# EAGLE board Qwiic_1Wire_to_I2C_Bridge_DS28E17_Panel (EAGLE 7.6.0), part 1 of 2
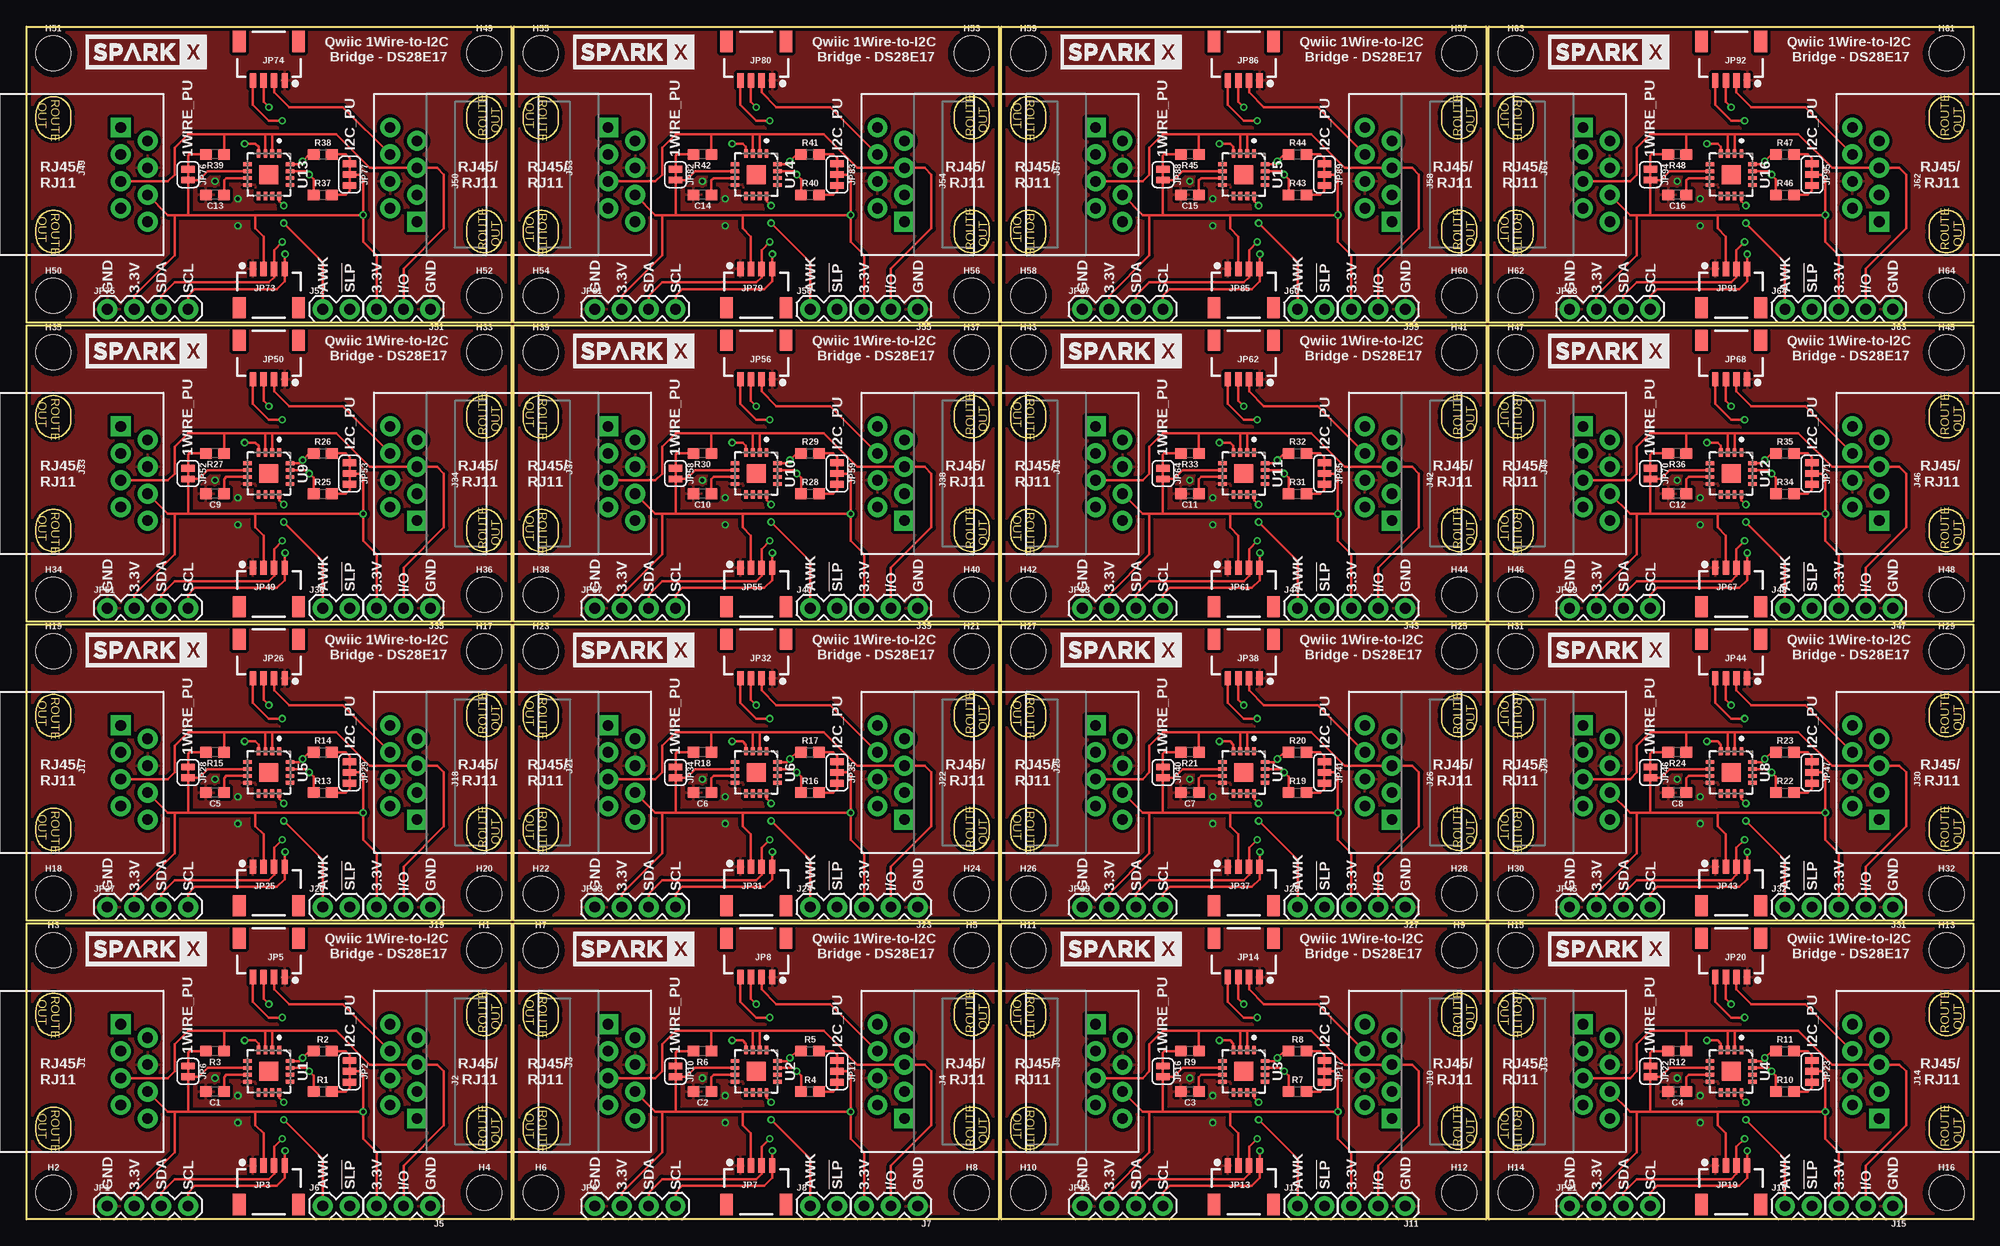
[diagram p0: board, top side]
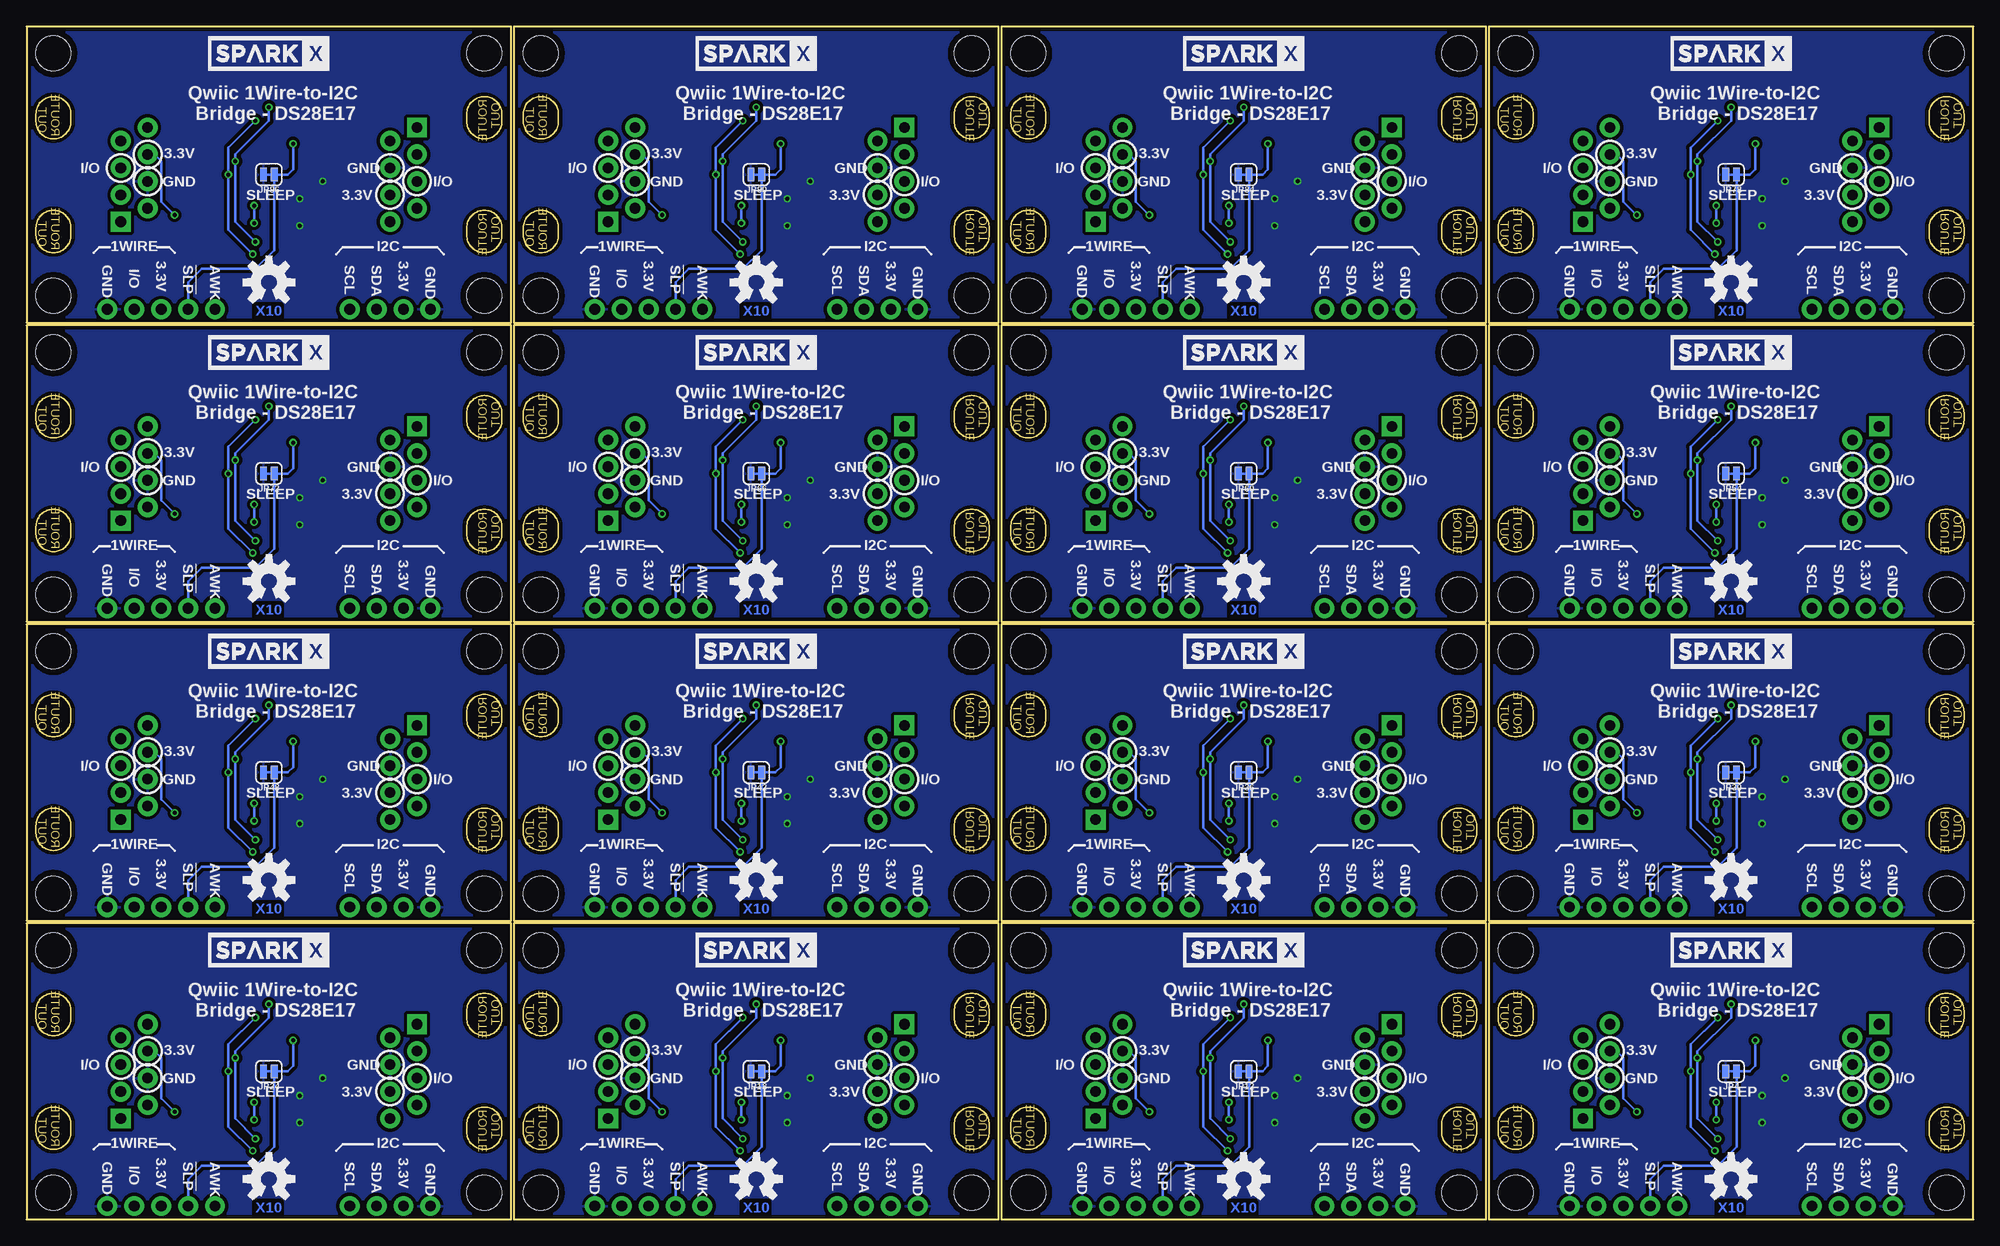
[diagram p1: board, bottom side, seen from below]

Size 183.64 x 112.52 mm. Coordinates in mm from the lower left corner, seen from the top.
Outline: 0,0 0,27.94 45.72,27.94 45.72,0 0,0
Outline: 45.97,0 45.97,27.94 91.69,27.94 91.69,0 45.97,0
Outline: 91.95,0 91.95,27.94 137.67,27.94 137.67,0 91.95,0
Outline: 137.92,0 137.92,27.94 183.64,27.94 183.64,0 137.92,0
Outline: 0,28.19 0,56.13 45.72,56.13 45.72,28.19 0,28.19
Outline: 45.97,28.19 45.97,56.13 91.69,56.13 91.69,28.19 45.97,28.19
Outline: 91.95,28.19 91.95,56.13 137.67,56.13 137.67,28.19 91.95,28.19
Outline: 137.92,28.19 137.92,56.13 183.64,56.13 183.64,28.19 137.92,28.19
Outline: 0,56.39 0,84.33 45.72,84.33 45.72,56.39 0,56.39
Outline: 45.97,56.39 45.97,84.33 91.69,84.33 91.69,56.39 45.97,56.39
Outline: 91.95,56.39 91.95,84.33 137.67,84.33 137.67,56.39 91.95,56.39
Outline: 137.92,56.39 137.92,84.33 183.64,84.33 183.64,56.39 137.92,56.39
Outline: 0,84.58 0,112.52 45.72,112.52 45.72,84.58 0,84.58
Outline: 45.97,84.58 45.97,112.52 91.69,112.52 91.69,84.58 45.97,84.58
Outline: 91.95,84.58 91.95,112.52 137.67,112.52 137.67,84.58 91.95,84.58
Outline: 137.92,84.58 137.92,112.52 183.64,112.52 183.64,84.58 137.92,84.58
Copper layers (1*16): Top 0.035mm / dielectric 1.5mm / Bottom 0.035mm
Design rules "ITEADstudio_DRC": minimum track width 6mil, minimum drill 12mil, track to track 6mil, track to pad 6mil, pad to pad 6mil, via to via 6mil, smd to smd 0mil, copper to edge 10mil, drill to drill 10mil, minimum pad ring 10mil, minimum via ring 6mil, stop-mask expansion 2mil, vias tented up to drill 100mil, thermal gap 10mil
Net classes: 0 default: width 0.203 mm; 1 power: width 0.381 mm, clearance 0.254 mm

## Footprints (pad centres in the part's own frame; a part is rotated, then mirrored left to right if it is on the bottom)
0603 = smd 1.1 x 1: 1 -0.85,0; 2 0.85,0
STAND-OFF = hole 3.302: 0,0
RJ45_RJ11_COMBO = drill 1 pad 1.88 square: 1 -4.445,6.35 | drill 1 pad 1.88: 2 -3.175,8.89; 3 -1.905,6.35; 4 -0.635,8.89; 5 0.635,6.35; 6 1.905,8.89; 7 3.175,6.35; 8 4.445,8.89
1X03 = drill 1.016 pad 1.88: 1 0,0; 2 2.54,0; 3 5.08,0
1X02 = drill 1.016 pad 1.88: 1 0,0; 2 2.54,0
1X04 = drill 1.016 pad 1.88: 1 0,0; 2 2.54,0; 3 5.08,0; 4 7.62,0
SMT-JUMPER_3_2-NC_TRACE_SILK = smd 0.635 x 1.27: 1 -1.016,0; 2 0,0; 3 1.016,0
1X04_1MM_RA = smd 0.6 x 1.35: 1 -1.5,0; 2 -0.5,0; 3 0.5,0; 4 1.5,0 | smd 1.2 x 2: NC1 2.8,-3.675; NC2 -2.8,-3.675
SMT-JUMPER_2_NC_TRACE_SILK = smd 0.635 x 1.27: 1 -0.508,0; 2 0.508,0
TQFN-16 = smd 0.8 x 0.35: 1 -2,0.975; 2 -2,0.325; 3 -2,-0.325; 4 -2,-0.975; 9 2,-0.975; 10 2,-0.325; 11 2,0.325; 12 2,0.975 | smd 0.35 x 0.8: 5 -0.975,-2; 6 -0.325,-2; 7 0.325,-2; 8 0.975,-2; 13 0.975,2; 14 0.325,2; 15 -0.325,2; 16 -0.975,2 | smd 1.778 x 1.778: PAD 0,0

## Placement (x,y rotation side)
C1  1.0uF  [0603]  17.78,12.06 180 top
C2  1.0uF  [0603]  63.75,12.06 180 top
C3  1.0uF  [0603]  109.73,12.06 180 top
C4  1.0uF  [0603]  155.7,12.06 180 top
C5  1.0uF  [0603]  17.78,40.26 180 top
C6  1.0uF  [0603]  63.75,40.26 180 top
C7  1.0uF  [0603]  109.73,40.26 180 top
C8  1.0uF  [0603]  155.7,40.26 180 top
C9  1.0uF  [0603]  17.78,68.45 180 top
C10  1.0uF  [0603]  63.75,68.45 180 top
C11  1.0uF  [0603]  109.73,68.45 180 top
C12  1.0uF  [0603]  155.7,68.45 180 top
C13  1.0uF  [0603]  17.78,96.65 180 top
C14  1.0uF  [0603]  63.75,96.65 180 top
C15  1.0uF  [0603]  109.73,96.65 180 top
C16  1.0uF  [0603]  155.7,96.65 180 top
FRAME1  FRAME-LETTER  [CREATIVE_COMMONS]  -5.08,-16.51 0 top  (outside the outline)
H1  STAND-OFF  [STAND-OFF]  43.18,25.4 0 top
H2  STAND-OFF  [STAND-OFF]  2.54,2.54 0 top
H3  STAND-OFF  [STAND-OFF]  2.54,25.4 0 top
H4  STAND-OFF  [STAND-OFF]  43.18,2.54 0 top
H5  STAND-OFF  [STAND-OFF]  89.15,25.4 0 top
H6  STAND-OFF  [STAND-OFF]  48.51,2.54 0 top
H7  STAND-OFF  [STAND-OFF]  48.51,25.4 0 top
H8  STAND-OFF  [STAND-OFF]  89.15,2.54 0 top
H9  STAND-OFF  [STAND-OFF]  135.13,25.4 0 top
H10  STAND-OFF  [STAND-OFF]  94.49,2.54 0 top
H11  STAND-OFF  [STAND-OFF]  94.49,25.4 0 top
H12  STAND-OFF  [STAND-OFF]  135.13,2.54 0 top
H13  STAND-OFF  [STAND-OFF]  181.1,25.4 0 top
H14  STAND-OFF  [STAND-OFF]  140.46,2.54 0 top
H15  STAND-OFF  [STAND-OFF]  140.46,25.4 0 top
H16  STAND-OFF  [STAND-OFF]  181.1,2.54 0 top
H17  STAND-OFF  [STAND-OFF]  43.18,53.59 0 top
H18  STAND-OFF  [STAND-OFF]  2.54,30.73 0 top
H19  STAND-OFF  [STAND-OFF]  2.54,53.59 0 top
H20  STAND-OFF  [STAND-OFF]  43.18,30.73 0 top
H21  STAND-OFF  [STAND-OFF]  89.15,53.59 0 top
H22  STAND-OFF  [STAND-OFF]  48.51,30.73 0 top
H23  STAND-OFF  [STAND-OFF]  48.51,53.59 0 top
H24  STAND-OFF  [STAND-OFF]  89.15,30.73 0 top
H25  STAND-OFF  [STAND-OFF]  135.13,53.59 0 top
H26  STAND-OFF  [STAND-OFF]  94.49,30.73 0 top
H27  STAND-OFF  [STAND-OFF]  94.49,53.59 0 top
H28  STAND-OFF  [STAND-OFF]  135.13,30.73 0 top
H29  STAND-OFF  [STAND-OFF]  181.1,53.59 0 top
H30  STAND-OFF  [STAND-OFF]  140.46,30.73 0 top
H31  STAND-OFF  [STAND-OFF]  140.46,53.59 0 top
H32  STAND-OFF  [STAND-OFF]  181.1,30.73 0 top
H33  STAND-OFF  [STAND-OFF]  43.18,81.79 0 top
H34  STAND-OFF  [STAND-OFF]  2.54,58.93 0 top
H35  STAND-OFF  [STAND-OFF]  2.54,81.79 0 top
H36  STAND-OFF  [STAND-OFF]  43.18,58.93 0 top
H37  STAND-OFF  [STAND-OFF]  89.15,81.79 0 top
H38  STAND-OFF  [STAND-OFF]  48.51,58.93 0 top
H39  STAND-OFF  [STAND-OFF]  48.51,81.79 0 top
H40  STAND-OFF  [STAND-OFF]  89.15,58.93 0 top
H41  STAND-OFF  [STAND-OFF]  135.13,81.79 0 top
H42  STAND-OFF  [STAND-OFF]  94.49,58.93 0 top
H43  STAND-OFF  [STAND-OFF]  94.49,81.79 0 top
H44  STAND-OFF  [STAND-OFF]  135.13,58.93 0 top
H45  STAND-OFF  [STAND-OFF]  181.1,81.79 0 top
H46  STAND-OFF  [STAND-OFF]  140.46,58.93 0 top
H47  STAND-OFF  [STAND-OFF]  140.46,81.79 0 top
H48  STAND-OFF  [STAND-OFF]  181.1,58.93 0 top
H49  STAND-OFF  [STAND-OFF]  43.18,109.98 0 top
H50  STAND-OFF  [STAND-OFF]  2.54,87.12 0 top
H51  STAND-OFF  [STAND-OFF]  2.54,109.98 0 top
H52  STAND-OFF  [STAND-OFF]  43.18,87.12 0 top
H53  STAND-OFF  [STAND-OFF]  89.15,109.98 0 top
H54  STAND-OFF  [STAND-OFF]  48.51,87.12 0 top
H55  STAND-OFF  [STAND-OFF]  48.51,109.98 0 top
H56  STAND-OFF  [STAND-OFF]  89.15,87.12 0 top
H57  STAND-OFF  [STAND-OFF]  135.13,109.98 0 top
H58  STAND-OFF  [STAND-OFF]  94.49,87.12 0 top
H59  STAND-OFF  [STAND-OFF]  94.49,109.98 0 top
H60  STAND-OFF  [STAND-OFF]  135.13,87.12 0 top
H61  STAND-OFF  [STAND-OFF]  181.1,109.98 0 top
H62  STAND-OFF  [STAND-OFF]  140.46,87.12 0 top
H63  STAND-OFF  [STAND-OFF]  140.46,109.98 0 top
H64  STAND-OFF  [STAND-OFF]  181.1,87.12 0 top
J1  RJ45_RJ11_COMBO  [RJ45_RJ11_COMBO]  2.54,13.97 270 top
J2  RJ45_RJ11_COMBO  [RJ45_RJ11_COMBO]  43.18,13.97 90 top
J3  RJ45_RJ11_COMBO  [RJ45_RJ11_COMBO]  48.51,13.97 270 top
J4  RJ45_RJ11_COMBO  [RJ45_RJ11_COMBO]  89.15,13.97 90 top
J5  [1X03]  38.1,1.27 180 top
J6  [1X02]  27.94,1.27 0 top
J7  [1X03]  84.07,1.27 180 top
J8  [1X02]  73.91,1.27 0 top
J9  RJ45_RJ11_COMBO  [RJ45_RJ11_COMBO]  94.49,13.97 270 top
J10  RJ45_RJ11_COMBO  [RJ45_RJ11_COMBO]  135.13,13.97 90 top
J11  [1X03]  130.05,1.27 180 top
J12  [1X02]  119.89,1.27 0 top
J13  RJ45_RJ11_COMBO  [RJ45_RJ11_COMBO]  140.46,13.97 270 top
J14  RJ45_RJ11_COMBO  [RJ45_RJ11_COMBO]  181.1,13.97 90 top
J15  [1X03]  176.02,1.27 180 top
J16  [1X02]  165.86,1.27 0 top
J17  RJ45_RJ11_COMBO  [RJ45_RJ11_COMBO]  2.54,42.16 270 top
J18  RJ45_RJ11_COMBO  [RJ45_RJ11_COMBO]  43.18,42.16 90 top
J19  [1X03]  38.1,29.46 180 top
J20  [1X02]  27.94,29.46 0 top
J21  RJ45_RJ11_COMBO  [RJ45_RJ11_COMBO]  48.51,42.16 270 top
J22  RJ45_RJ11_COMBO  [RJ45_RJ11_COMBO]  89.15,42.16 90 top
J23  [1X03]  84.07,29.46 180 top
J24  [1X02]  73.91,29.46 0 top
J25  RJ45_RJ11_COMBO  [RJ45_RJ11_COMBO]  94.49,42.16 270 top
J26  RJ45_RJ11_COMBO  [RJ45_RJ11_COMBO]  135.13,42.16 90 top
J27  [1X03]  130.05,29.46 180 top
J28  [1X02]  119.89,29.46 0 top
J29  RJ45_RJ11_COMBO  [RJ45_RJ11_COMBO]  140.46,42.16 270 top
J30  RJ45_RJ11_COMBO  [RJ45_RJ11_COMBO]  181.1,42.16 90 top
J31  [1X03]  176.02,29.46 180 top
J32  [1X02]  165.86,29.46 0 top
J33  RJ45_RJ11_COMBO  [RJ45_RJ11_COMBO]  2.54,70.36 270 top
J34  RJ45_RJ11_COMBO  [RJ45_RJ11_COMBO]  43.18,70.36 90 top
J35  [1X03]  38.1,57.66 180 top
J36  [1X02]  27.94,57.66 0 top
J37  RJ45_RJ11_COMBO  [RJ45_RJ11_COMBO]  48.51,70.36 270 top
J38  RJ45_RJ11_COMBO  [RJ45_RJ11_COMBO]  89.15,70.36 90 top
J39  [1X03]  84.07,57.66 180 top
J40  [1X02]  73.91,57.66 0 top
J41  RJ45_RJ11_COMBO  [RJ45_RJ11_COMBO]  94.49,70.36 270 top
J42  RJ45_RJ11_COMBO  [RJ45_RJ11_COMBO]  135.13,70.36 90 top
J43  [1X03]  130.05,57.66 180 top
J44  [1X02]  119.89,57.66 0 top
J45  RJ45_RJ11_COMBO  [RJ45_RJ11_COMBO]  140.46,70.36 270 top
J46  RJ45_RJ11_COMBO  [RJ45_RJ11_COMBO]  181.1,70.36 90 top
J47  [1X03]  176.02,57.66 180 top
J48  [1X02]  165.86,57.66 0 top
J49  RJ45_RJ11_COMBO  [RJ45_RJ11_COMBO]  2.54,98.55 270 top
J50  RJ45_RJ11_COMBO  [RJ45_RJ11_COMBO]  43.18,98.55 90 top
J51  [1X03]  38.1,85.85 180 top
J52  [1X02]  27.94,85.85 0 top
J53  RJ45_RJ11_COMBO  [RJ45_RJ11_COMBO]  48.51,98.55 270 top
J54  RJ45_RJ11_COMBO  [RJ45_RJ11_COMBO]  89.15,98.55 90 top
J55  [1X03]  84.07,85.85 180 top
J56  [1X02]  73.91,85.85 0 top
J57  RJ45_RJ11_COMBO  [RJ45_RJ11_COMBO]  94.49,98.55 270 top
J58  RJ45_RJ11_COMBO  [RJ45_RJ11_COMBO]  135.13,98.55 90 top
J59  [1X03]  130.05,85.85 180 top
J60  [1X02]  119.89,85.85 0 top
J61  RJ45_RJ11_COMBO  [RJ45_RJ11_COMBO]  140.46,98.55 270 top
J62  RJ45_RJ11_COMBO  [RJ45_RJ11_COMBO]  181.1,98.55 90 top
J63  [1X03]  176.02,85.85 180 top
J64  [1X02]  165.86,85.85 0 top
JP1  [1X04]  7.62,1.27 0 top
JP2  [SMT-JUMPER_3_2-NC_TRACE_SILK]  30.48,13.97 270 top
JP3  [1X04_1MM_RA]  22.86,5.08 0 top
JP4  [SMT-JUMPER_2_NC_TRACE_SILK]  22.86,13.97 180 bottom
JP5  [1X04_1MM_RA]  22.86,22.86 180 top
JP6  [SMT-JUMPER_2_NC_TRACE_SILK]  15.24,13.97 270 top
JP7  [1X04_1MM_RA]  68.83,5.08 0 top
JP8  [1X04_1MM_RA]  68.83,22.86 180 top
JP9  [1X04]  53.59,1.27 0 top
JP10  [SMT-JUMPER_2_NC_TRACE_SILK]  61.21,13.97 270 top
JP11  [SMT-JUMPER_3_2-NC_TRACE_SILK]  76.45,13.97 270 top
JP12  [SMT-JUMPER_2_NC_TRACE_SILK]  68.83,13.97 180 bottom
JP13  [1X04_1MM_RA]  114.81,5.08 0 top
JP14  [1X04_1MM_RA]  114.81,22.86 180 top
JP15  [1X04]  99.57,1.27 0 top
JP16  [SMT-JUMPER_2_NC_TRACE_SILK]  107.19,13.97 270 top
JP17  [SMT-JUMPER_3_2-NC_TRACE_SILK]  122.43,13.97 270 top
JP18  [SMT-JUMPER_2_NC_TRACE_SILK]  114.81,13.97 180 bottom
JP19  [1X04_1MM_RA]  160.78,5.08 0 top
JP20  [1X04_1MM_RA]  160.78,22.86 180 top
JP21  [1X04]  145.54,1.27 0 top
JP22  [SMT-JUMPER_2_NC_TRACE_SILK]  153.16,13.97 270 top
JP23  [SMT-JUMPER_3_2-NC_TRACE_SILK]  168.4,13.97 270 top
JP24  [SMT-JUMPER_2_NC_TRACE_SILK]  160.78,13.97 180 bottom
JP25  [1X04_1MM_RA]  22.86,33.27 0 top
JP26  [1X04_1MM_RA]  22.86,51.05 180 top
JP27  [1X04]  7.62,29.46 0 top
JP28  [SMT-JUMPER_2_NC_TRACE_SILK]  15.24,42.16 270 top
JP29  [SMT-JUMPER_3_2-NC_TRACE_SILK]  30.48,42.16 270 top
JP30  [SMT-JUMPER_2_NC_TRACE_SILK]  22.86,42.16 180 bottom
JP31  [1X04_1MM_RA]  68.83,33.27 0 top
JP32  [1X04_1MM_RA]  68.83,51.05 180 top
JP33  [1X04]  53.59,29.46 0 top
JP34  [SMT-JUMPER_2_NC_TRACE_SILK]  61.21,42.16 270 top
JP35  [SMT-JUMPER_3_2-NC_TRACE_SILK]  76.45,42.16 270 top
JP36  [SMT-JUMPER_2_NC_TRACE_SILK]  68.83,42.16 180 bottom
JP37  [1X04_1MM_RA]  114.81,33.27 0 top
JP38  [1X04_1MM_RA]  114.81,51.05 180 top
JP39  [1X04]  99.57,29.46 0 top
JP40  [SMT-JUMPER_2_NC_TRACE_SILK]  107.19,42.16 270 top
JP41  [SMT-JUMPER_3_2-NC_TRACE_SILK]  122.43,42.16 270 top
JP42  [SMT-JUMPER_2_NC_TRACE_SILK]  114.81,42.16 180 bottom
JP43  [1X04_1MM_RA]  160.78,33.27 0 top
JP44  [1X04_1MM_RA]  160.78,51.05 180 top
JP45  [1X04]  145.54,29.46 0 top
JP46  [SMT-JUMPER_2_NC_TRACE_SILK]  153.16,42.16 270 top
JP47  [SMT-JUMPER_3_2-NC_TRACE_SILK]  168.4,42.16 270 top
JP48  [SMT-JUMPER_2_NC_TRACE_SILK]  160.78,42.16 180 bottom
JP49  [1X04_1MM_RA]  22.86,61.47 0 top
JP50  [1X04_1MM_RA]  22.86,79.25 180 top
JP51  [1X04]  7.62,57.66 0 top
JP52  [SMT-JUMPER_2_NC_TRACE_SILK]  15.24,70.36 270 top
JP53  [SMT-JUMPER_3_2-NC_TRACE_SILK]  30.48,70.36 270 top
JP54  [SMT-JUMPER_2_NC_TRACE_SILK]  22.86,70.36 180 bottom
JP55  [1X04_1MM_RA]  68.83,61.47 0 top
JP56  [1X04_1MM_RA]  68.83,79.25 180 top
JP57  [1X04]  53.59,57.66 0 top
JP58  [SMT-JUMPER_2_NC_TRACE_SILK]  61.21,70.36 270 top
JP59  [SMT-JUMPER_3_2-NC_TRACE_SILK]  76.45,70.36 270 top
JP60  [SMT-JUMPER_2_NC_TRACE_SILK]  68.83,70.36 180 bottom
JP61  [1X04_1MM_RA]  114.81,61.47 0 top
JP62  [1X04_1MM_RA]  114.81,79.25 180 top
JP63  [1X04]  99.57,57.66 0 top
JP64  [SMT-JUMPER_2_NC_TRACE_SILK]  107.19,70.36 270 top
JP65  [SMT-JUMPER_3_2-NC_TRACE_SILK]  122.43,70.36 270 top
JP66  [SMT-JUMPER_2_NC_TRACE_SILK]  114.81,70.36 180 bottom
JP67  [1X04_1MM_RA]  160.78,61.47 0 top
JP68  [1X04_1MM_RA]  160.78,79.25 180 top
JP69  [1X04]  145.54,57.66 0 top
JP70  [SMT-JUMPER_2_NC_TRACE_SILK]  153.16,70.36 270 top
JP71  [SMT-JUMPER_3_2-NC_TRACE_SILK]  168.4,70.36 270 top
JP72  [SMT-JUMPER_2_NC_TRACE_SILK]  160.78,70.36 180 bottom
JP73  [1X04_1MM_RA]  22.86,89.66 0 top
JP74  [1X04_1MM_RA]  22.86,107.44 180 top
JP75  [1X04]  7.62,85.85 0 top
JP76  [SMT-JUMPER_2_NC_TRACE_SILK]  15.24,98.55 270 top
JP77  [SMT-JUMPER_3_2-NC_TRACE_SILK]  30.48,98.55 270 top
JP78  [SMT-JUMPER_2_NC_TRACE_SILK]  22.86,98.55 180 bottom
JP79  [1X04_1MM_RA]  68.83,89.66 0 top
JP80  [1X04_1MM_RA]  68.83,107.44 180 top
JP81  [1X04]  53.59,85.85 0 top
JP82  [SMT-JUMPER_2_NC_TRACE_SILK]  61.21,98.55 270 top
JP83  [SMT-JUMPER_3_2-NC_TRACE_SILK]  76.45,98.55 270 top
JP84  [SMT-JUMPER_2_NC_TRACE_SILK]  68.83,98.55 180 bottom
JP85  [1X04_1MM_RA]  114.81,89.66 0 top
JP86  [1X04_1MM_RA]  114.81,107.44 180 top
JP87  [1X04]  99.57,85.85 0 top
JP88  [SMT-JUMPER_2_NC_TRACE_SILK]  107.19,98.55 270 top
JP89  [SMT-JUMPER_3_2-NC_TRACE_SILK]  122.43,98.55 270 top
JP90  [SMT-JUMPER_2_NC_TRACE_SILK]  114.81,98.55 180 bottom
JP91  [1X04_1MM_RA]  160.78,89.66 0 top
JP92  [1X04_1MM_RA]  160.78,107.44 180 top
JP93  [1X04]  145.54,85.85 0 top
JP94  [SMT-JUMPER_2_NC_TRACE_SILK]  153.16,98.55 270 top
JP95  [SMT-JUMPER_3_2-NC_TRACE_SILK]  168.4,98.55 270 top
JP96  [SMT-JUMPER_2_NC_TRACE_SILK]  160.78,98.55 180 bottom
LOGO1  OSHW-LOGOM  [OSHW-LOGO-M]  22.86,3.81 0 bottom
LOGO2  OSHW-LOGOM  [OSHW-LOGO-M]  68.83,3.81 0 bottom
LOGO3  OSHW-LOGOM  [OSHW-LOGO-M]  114.81,3.81 0 bottom
LOGO4  OSHW-LOGOM  [OSHW-LOGO-M]  160.78,3.81 0 bottom
LOGO5  OSHW-LOGOM  [OSHW-LOGO-M]  22.86,32 0 bottom
LOGO6  OSHW-LOGOM  [OSHW-LOGO-M]  68.83,32 0 bottom
LOGO7  OSHW-LOGOM  [OSHW-LOGO-M]  114.81,32 0 bottom
LOGO8  OSHW-LOGOM  [OSHW-LOGO-M]  160.78,32 0 bottom
LOGO9  OSHW-LOGOM  [OSHW-LOGO-M]  22.86,60.2 0 bottom
LOGO10  OSHW-LOGOM  [OSHW-LOGO-M]  68.83,60.2 0 bottom
LOGO11  OSHW-LOGOM  [OSHW-LOGO-M]  114.81,60.2 0 bottom
LOGO12  OSHW-LOGOM  [OSHW-LOGO-M]  160.78,60.2 0 bottom
LOGO13  OSHW-LOGOM  [OSHW-LOGO-M]  22.86,88.39 0 bottom
LOGO14  OSHW-LOGOM  [OSHW-LOGO-M]  68.83,88.39 0 bottom
LOGO15  OSHW-LOGOM  [OSHW-LOGO-M]  114.81,88.39 0 bottom
LOGO16  OSHW-LOGOM  [OSHW-LOGO-M]  160.78,88.39 0 bottom
R1  4.7k  [0603]  27.94,12.06 0 top
R2  4.7k  [0603]  27.94,15.88 0 top
R3  4.7k  [0603]  17.78,15.88 180 top
R4  4.7k  [0603]  73.91,12.06 0 top
R5  4.7k  [0603]  73.91,15.88 0 top
R6  4.7k  [0603]  63.75,15.88 180 top
R7  4.7k  [0603]  119.89,12.06 0 top
R8  4.7k  [0603]  119.89,15.88 0 top
R9  4.7k  [0603]  109.73,15.88 180 top
R10  4.7k  [0603]  165.86,12.06 0 top
R11  4.7k  [0603]  165.86,15.88 0 top
R12  4.7k  [0603]  155.7,15.88 180 top
R13  4.7k  [0603]  27.94,40.26 0 top
R14  4.7k  [0603]  27.94,44.07 0 top
R15  4.7k  [0603]  17.78,44.07 180 top
R16  4.7k  [0603]  73.91,40.26 0 top
R17  4.7k  [0603]  73.91,44.07 0 top
R18  4.7k  [0603]  63.75,44.07 180 top
R19  4.7k  [0603]  119.89,40.26 0 top
R20  4.7k  [0603]  119.89,44.07 0 top
R21  4.7k  [0603]  109.73,44.07 180 top
R22  4.7k  [0603]  165.86,40.26 0 top
R23  4.7k  [0603]  165.86,44.07 0 top
R24  4.7k  [0603]  155.7,44.07 180 top
R25  4.7k  [0603]  27.94,68.45 0 top
R26  4.7k  [0603]  27.94,72.26 0 top
R27  4.7k  [0603]  17.78,72.26 180 top
R28  4.7k  [0603]  73.91,68.45 0 top
R29  4.7k  [0603]  73.91,72.26 0 top
R30  4.7k  [0603]  63.75,72.26 180 top
R31  4.7k  [0603]  119.89,68.45 0 top
R32  4.7k  [0603]  119.89,72.26 0 top
R33  4.7k  [0603]  109.73,72.26 180 top
R34  4.7k  [0603]  165.86,68.45 0 top
R35  4.7k  [0603]  165.86,72.26 0 top
R36  4.7k  [0603]  155.7,72.26 180 top
R37  4.7k  [0603]  27.94,96.65 0 top
R38  4.7k  [0603]  27.94,100.46 0 top
R39  4.7k  [0603]  17.78,100.46 180 top
R40  4.7k  [0603]  73.91,96.65 0 top
R41  4.7k  [0603]  73.91,100.46 0 top
R42  4.7k  [0603]  63.75,100.46 180 top
R43  4.7k  [0603]  119.89,96.65 0 top
R44  4.7k  [0603]  119.89,100.46 0 top
R45  4.7k  [0603]  109.73,100.46 180 top
R46  4.7k  [0603]  165.86,96.65 0 top
R47  4.7k  [0603]  165.86,100.46 0 top
R48  4.7k  [0603]  155.7,100.46 180 top
U1  DS28E17  [TQFN-16]  22.86,13.97 270 top
U2  DS28E17  [TQFN-16]  68.83,13.97 270 top
U3  DS28E17  [TQFN-16]  114.81,13.97 270 top
U4  DS28E17  [TQFN-16]  160.78,13.97 270 top
U5  DS28E17  [TQFN-16]  22.86,42.16 270 top
U6  DS28E17  [TQFN-16]  68.83,42.16 270 top
U7  DS28E17  [TQFN-16]  114.81,42.16 270 top
U8  DS28E17  [TQFN-16]  160.78,42.16 270 top
U9  DS28E17  [TQFN-16]  22.86,70.36 270 top
U10  DS28E17  [TQFN-16]  68.83,70.36 270 top
U11  DS28E17  [TQFN-16]  114.81,70.36 270 top
U12  DS28E17  [TQFN-16]  160.78,70.36 270 top
U13  DS28E17  [TQFN-16]  22.86,98.55 270 top
U14  DS28E17  [TQFN-16]  68.83,98.55 270 top
U15  DS28E17  [TQFN-16]  114.81,98.55 270 top
U16  DS28E17  [TQFN-16]  160.78,98.55 270 top
U$1  SPARKX-LOGO5  [SPARKX-LARGE]  57.28,25.53 0 top
U$2  SPARKX-LOGO5  [SPARKX-LARGE]  11.3,25.53 0 top
U$3  SPARKX-LOGO5  [SPARKX-LARGE]  22.86,25.4 0 bottom
U$4  SPARKX-LOGO5  [SPARKX-LARGE]  68.83,25.4 0 bottom
U$5  SPARKX-LOGO5  [SPARKX-LARGE]  103.25,25.53 0 top
U$6  SPARKX-LOGO5  [SPARKX-LARGE]  114.81,25.4 0 bottom
U$7  SPARKX-LOGO5  [SPARKX-LARGE]  149.22,25.53 0 top
U$8  SPARKX-LOGO5  [SPARKX-LARGE]  160.78,25.4 0 bottom
U$9  SPARKX-LOGO5  [SPARKX-LARGE]  11.3,53.72 0 top
U$10  SPARKX-LOGO5  [SPARKX-LARGE]  22.86,53.59 0 bottom
U$11  SPARKX-LOGO5  [SPARKX-LARGE]  57.28,53.72 0 top
U$12  SPARKX-LOGO5  [SPARKX-LARGE]  68.83,53.59 0 bottom
U$13  SPARKX-LOGO5  [SPARKX-LARGE]  103.25,53.72 0 top
U$14  SPARKX-LOGO5  [SPARKX-LARGE]  114.81,53.59 0 bottom
U$15  SPARKX-LOGO5  [SPARKX-LARGE]  149.22,53.72 0 top
U$16  SPARKX-LOGO5  [SPARKX-LARGE]  160.78,53.59 0 bottom
U$17  SPARKX-LOGO5  [SPARKX-LARGE]  11.3,81.92 0 top
U$18  SPARKX-LOGO5  [SPARKX-LARGE]  22.86,81.79 0 bottom
U$19  SPARKX-LOGO5  [SPARKX-LARGE]  57.28,81.92 0 top
U$20  SPARKX-LOGO5  [SPARKX-LARGE]  68.83,81.79 0 bottom
U$21  SPARKX-LOGO5  [SPARKX-LARGE]  103.25,81.92 0 top
U$22  SPARKX-LOGO5  [SPARKX-LARGE]  114.81,81.79 0 bottom
U$23  SPARKX-LOGO5  [SPARKX-LARGE]  149.22,81.92 0 top
U$24  SPARKX-LOGO5  [SPARKX-LARGE]  160.78,81.79 0 bottom
U$25  SPARKX-LOGO5  [SPARKX-LARGE]  11.3,110.11 0 top
U$26  SPARKX-LOGO5  [SPARKX-LARGE]  22.86,109.98 0 bottom
U$27  SPARKX-LOGO5  [SPARKX-LARGE]  57.28,110.11 0 top
U$28  SPARKX-LOGO5  [SPARKX-LARGE]  68.83,109.98 0 bottom
U$29  SPARKX-LOGO5  [SPARKX-LARGE]  103.25,110.11 0 top
U$30  SPARKX-LOGO5  [SPARKX-LARGE]  114.81,109.98 0 bottom
U$31  SPARKX-LOGO5  [SPARKX-LARGE]  149.22,110.11 0 top
U$32  SPARKX-LOGO5  [SPARKX-LARGE]  160.78,109.98 0 bottom

## Library data of the parts
C1-C16 = SparkFun-Capacitors; PROD_ID: CAP-00868
FRAME1 LOGO1-LOGO16 = SparkFun-Aesthetics
H1-H64 = SparkFun-Hardware
J1-J4 J9 J10 J13 J14 J17 J18 J21 J22 J25 J26 J29 J30 J33 J34 J37 J38 J41 J42 J45 J46 J49 J50 J53 J54 J57 J58 J61 J62 JP1 JP3 JP5 JP7-JP9 JP13-JP15 JP19-JP21 JP25-JP27 JP31-JP33 JP37-JP39 JP43-JP45 JP49-JP51 JP55-JP57 JP61-JP63 JP67-JP69 JP73-JP75 JP79-JP81 JP85-JP87 JP91-JP93 U1-U16 U$1-U$32 = SparkX
J5-J8 J11 J12 J15 J16 J19 J20 J23 J24 J27 J28 J31 J32 J35 J36 J39 J40 J43 J44 J47 J48 J51 J52 J55 J56 J59 J60 J63 J64 = SparkFun-Connectors
JP2 JP4 JP6 JP10-JP12 JP16-JP18 JP22-JP24 JP28-JP30 JP34-JP36 JP40-JP42 JP46-JP48 JP52-JP54 JP58-JP60 JP64-JP66 JP70-JP72 JP76-JP78 JP82-JP84 JP88-JP90 JP94-JP96 = SparkFun-Jumpers
R1-R48 = SparkFun-Resistors; PROD_ID: RES-07857

## Nets
3.3V: J1.6 J2.6 J5.3 JP1.2 JP2.2 JP3.2 JP5.2 JP6.2 U1.6
3.3V1: J3.6 J4.6 J7.3 JP7.2 JP8.2 JP9.2 JP10.2 JP11.2 U2.6
3.3V2: J9.6 J10.6 J11.3 JP13.2 JP14.2 JP15.2 JP16.2 JP17.2 U3.6
3.3V3: J13.6 J14.6 J15.3 JP19.2 JP20.2 JP21.2 JP22.2 JP23.2 U4.6
3.3V4: J17.6 J18.6 J19.3 JP25.2 JP26.2 JP27.2 JP28.2 JP29.2 U5.6
3.3V5: J21.6 J22.6 J23.3 JP31.2 JP32.2 JP33.2 JP34.2 JP35.2 U6.6
3.3V6: J25.6 J26.6 J27.3 JP37.2 JP38.2 JP39.2 JP40.2 JP41.2 U7.6
3.3V7: J29.6 J30.6 J31.3 JP43.2 JP44.2 JP45.2 JP46.2 JP47.2 U8.6
3.3V8: J33.6 J34.6 J35.3 JP49.2 JP50.2 JP51.2 JP52.2 JP53.2 U9.6
3.3V9: J37.6 J38.6 J39.3 JP55.2 JP56.2 JP57.2 JP58.2 JP59.2 U10.6
3.3V10: J41.6 J42.6 J43.3 JP61.2 JP62.2 JP63.2 JP64.2 JP65.2 U11.6
3.3V11: J45.6 J46.6 J47.3 JP67.2 JP68.2 JP69.2 JP70.2 JP71.2 U12.6
3.3V12: J49.6 J50.6 J51.3 JP73.2 JP74.2 JP75.2 JP76.2 JP77.2 U13.6
3.3V13: J53.6 J54.6 J55.3 JP79.2 JP80.2 JP81.2 JP82.2 JP83.2 U14.6
3.3V14: J57.6 J58.6 J59.3 JP85.2 JP86.2 JP87.2 JP88.2 JP89.2 U15.6
3.3V15: J61.6 J62.6 J63.3 JP91.2 JP92.2 JP93.2 JP94.2 JP95.2 U16.6
!SLEEP: J6.2 JP4.1 U1.4
!SLEEP1: J8.2 JP12.1 U2.4
!SLEEP2: J12.2 JP18.1 U3.4
!SLEEP3: J16.2 JP24.1 U4.4
!SLEEP4: J20.2 JP30.1 U5.4
!SLEEP5: J24.2 JP36.1 U6.4
!SLEEP6: J28.2 JP42.1 U7.4
!SLEEP7: J32.2 JP48.1 U8.4
!SLEEP8: J36.2 JP54.1 U9.4
!SLEEP9: J40.2 JP60.1 U10.4
!SLEEP10: J44.2 JP66.1 U11.4
!SLEEP11: J48.2 JP72.1 U12.4
!SLEEP12: J52.2 JP78.1 U13.4
!SLEEP13: J56.2 JP84.1 U14.4
!SLEEP14: J60.2 JP90.1 U15.4
!SLEEP15: J64.2 JP96.1 U16.4
AWAKE: J6.1 U1.12
AWAKE1: J8.1 U2.12
AWAKE2: J12.1 U3.12
AWAKE3: J16.1 U4.12
AWAKE4: J20.1 U5.12
AWAKE5: J24.1 U6.12
AWAKE6: J28.1 U7.12
AWAKE7: J32.1 U8.12
AWAKE8: J36.1 U9.12
AWAKE9: J40.1 U10.12
AWAKE10: J44.1 U11.12
AWAKE11: J48.1 U12.12
AWAKE12: J52.1 U13.12
AWAKE13: J56.1 U14.12
AWAKE14: J60.1 U15.12
AWAKE15: J64.1 U16.12
BUSY: U1.13
BUSY1: U2.13
BUSY2: U3.13
BUSY3: U4.13
BUSY4: U5.13
BUSY5: U6.13
BUSY6: U7.13
BUSY7: U8.13
BUSY8: U9.13
BUSY9: U10.13
BUSY10: U11.13
BUSY11: U12.13
BUSY12: U13.13
BUSY13: U14.13
BUSY14: U15.13
BUSY15: U16.13
ED: U1.5
ED1: U2.5
ED2: U3.5
ED3: U4.5
ED4: U5.5
ED5: U6.5
ED6: U7.5
ED7: U8.5
ED8: U9.5
ED9: U10.5
ED10: U11.5
ED11: U12.5
ED12: U13.5
ED13: U14.5
ED14: U15.5
ED15: U16.5
GND: C1.2 J1.4 J2.4 J5.1 JP1.1 JP3.1 JP4.2 JP5.1 U1.8
GND1: C2.2 J3.4 J4.4 J7.1 JP7.1 JP8.1 JP9.1 JP12.2 U2.8
GND2: C3.2 J9.4 J10.4 J11.1 JP13.1 JP14.1 JP15.1 JP18.2 U3.8
GND3: C4.2 J13.4 J14.4 J15.1 JP19.1 JP20.1 JP21.1 JP24.2 U4.8
GND4: C5.2 J17.4 J18.4 J19.1 JP25.1 JP26.1 JP27.1 JP30.2 U5.8
GND5: C6.2 J21.4 J22.4 J23.1 JP31.1 JP32.1 JP33.1 JP36.2 U6.8
GND6: C7.2 J25.4 J26.4 J27.1 JP37.1 JP38.1 JP39.1 JP42.2 U7.8
GND7: C8.2 J29.4 J30.4 J31.1 JP43.1 JP44.1 JP45.1 JP48.2 U8.8
GND8: C9.2 J33.4 J34.4 J35.1 JP49.1 JP50.1 JP51.1 JP54.2 U9.8
GND9: C10.2 J37.4 J38.4 J39.1 JP55.1 JP56.1 JP57.1 JP60.2 U10.8
GND10: C11.2 J41.4 J42.4 J43.1 JP61.1 JP62.1 JP63.1 JP66.2 U11.8
GND11: C12.2 J45.4 J46.4 J47.1 JP67.1 JP68.1 JP69.1 JP72.2 U12.8
GND12: C13.2 J49.4 J50.4 J51.1 JP73.1 JP74.1 JP75.1 JP78.2 U13.8
GND13: C14.2 J53.4 J54.4 J55.1 JP79.1 JP80.1 JP81.1 JP84.2 U14.8
GND14: C15.2 J57.4 J58.4 J59.1 JP85.1 JP86.1 JP87.1 JP90.2 U15.8
GND15: C16.2 J61.4 J62.4 J63.1 JP91.1 JP92.1 JP93.1 JP96.2 U16.8
IO: J1.5 J2.5 J5.2 R3.1 U1.2 U1.3
IO1: J3.5 J4.5 J7.2 R6.1 U2.2 U2.3
IO2: J9.5 J10.5 J11.2 R9.1 U3.2 U3.3
IO3: J13.5 J14.5 J15.2 R12.1 U4.2 U4.3
IO4: J17.5 J18.5 J19.2 R15.1 U5.2 U5.3
IO5: J21.5 J22.5 J23.2 R18.1 U6.2 U6.3
IO6: J25.5 J26.5 J27.2 R21.1 U7.2 U7.3
IO7: J29.5 J30.5 J31.2 R24.1 U8.2 U8.3
IO8: J33.5 J34.5 J35.2 R27.1 U9.2 U9.3
IO9: J37.5 J38.5 J39.2 R30.1 U10.2 U10.3
IO10: J41.5 J42.5 J43.2 R33.1 U11.2 U11.3
IO11: J45.5 J46.5 J47.2 R36.1 U12.2 U12.3
IO12: J49.5 J50.5 J51.2 R39.1 U13.2 U13.3
IO13: J53.5 J54.5 J55.2 R42.1 U14.2 U14.3
IO14: J57.5 J58.5 J59.2 R45.1 U15.2 U15.3
IO15: J61.5 J62.5 J63.2 R48.1 U16.2 U16.3
N$1: C1.1 U1.7
N$2: JP6.1 R3.2
N$3: JP2.1 R2.2
N$4: JP2.3 R1.2
N$5: C2.1 U2.7
N$6: JP10.1 R6.2
N$7: JP11.1 R5.2
N$8: JP11.3 R4.2
N$9: C3.1 U3.7
N$10: JP16.1 R9.2
N$11: JP17.1 R8.2
N$12: JP17.3 R7.2
N$13: C4.1 U4.7
N$14: JP22.1 R12.2
N$15: JP23.1 R11.2
N$16: JP23.3 R10.2
N$17: C5.1 U5.7
N$18: JP28.1 R15.2
N$19: JP29.1 R14.2
N$20: JP29.3 R13.2
N$21: C6.1 U6.7
N$22: JP34.1 R18.2
N$23: JP35.1 R17.2
N$24: JP35.3 R16.2
N$25: C7.1 U7.7
N$26: JP40.1 R21.2
N$27: JP41.1 R20.2
N$28: JP41.3 R19.2
N$29: C8.1 U8.7
N$30: JP46.1 R24.2
N$31: JP47.1 R23.2
N$32: JP47.3 R22.2
N$33: C9.1 U9.7
N$34: JP52.1 R27.2
N$35: JP53.1 R26.2
N$36: JP53.3 R25.2
N$37: C10.1 U10.7
N$38: JP58.1 R30.2
N$39: JP59.1 R29.2
N$40: JP59.3 R28.2
N$41: C11.1 U11.7
N$42: JP64.1 R33.2
N$43: JP65.1 R32.2
N$44: JP65.3 R31.2
N$45: C12.1 U12.7
N$46: JP70.1 R36.2
N$47: JP71.1 R35.2
N$48: JP71.3 R34.2
N$49: C13.1 U13.7
N$50: JP76.1 R39.2
N$51: JP77.1 R38.2
N$52: JP77.3 R37.2
N$53: C14.1 U14.7
N$54: JP82.1 R42.2
N$55: JP83.1 R41.2
N$56: JP83.3 R40.2
N$57: C15.1 U15.7
N$58: JP88.1 R45.2
N$59: JP89.1 R44.2
N$60: JP89.3 R43.2
N$61: C16.1 U16.7
N$62: JP94.1 R48.2
N$63: JP95.1 R47.2
N$64: JP95.3 R46.2
SCL: JP1.4 JP3.4 JP5.4 R1.1 U1.15
SCL1: JP7.4 JP8.4 JP9.4 R4.1 U2.15
SCL2: JP13.4 JP14.4 JP15.4 R7.1 U3.15
SCL3: JP19.4 JP20.4 JP21.4 R10.1 U4.15
SCL4: JP25.4 JP26.4 JP27.4 R13.1 U5.15
SCL5: JP31.4 JP32.4 JP33.4 R16.1 U6.15
SCL6: JP37.4 JP38.4 JP39.4 R19.1 U7.15
SCL7: JP43.4 JP44.4 JP45.4 R22.1 U8.15
SCL8: JP49.4 JP50.4 JP51.4 R25.1 U9.15
SCL9: JP55.4 JP56.4 JP57.4 R28.1 U10.15
SCL10: JP61.4 JP62.4 JP63.4 R31.1 U11.15
SCL11: JP67.4 JP68.4 JP69.4 R34.1 U12.15
SCL12: JP73.4 JP74.4 JP75.4 R37.1 U13.15
SCL13: JP79.4 JP80.4 JP81.4 R40.1 U14.15
SCL14: JP85.4 JP86.4 JP87.4 R43.1 U15.15
SCL15: JP91.4 JP92.4 JP93.4 R46.1 U16.15
SDA: JP1.3 JP3.3 JP5.3 R2.1 U1.16
SDA1: JP7.3 JP8.3 JP9.3 R5.1 U2.16
SDA2: JP13.3 JP14.3 JP15.3 R8.1 U3.16
SDA3: JP19.3 JP20.3 JP21.3 R11.1 U4.16
SDA4: JP25.3 JP26.3 JP27.3 R14.1 U5.16
SDA5: JP31.3 JP32.3 JP33.3 R17.1 U6.16
SDA6: JP37.3 JP38.3 JP39.3 R20.1 U7.16
SDA7: JP43.3 JP44.3 JP45.3 R23.1 U8.16
SDA8: JP49.3 JP50.3 JP51.3 R26.1 U9.16
SDA9: JP55.3 JP56.3 JP57.3 R29.1 U10.16
SDA10: JP61.3 JP62.3 JP63.3 R32.1 U11.16
SDA11: JP67.3 JP68.3 JP69.3 R35.1 U12.16
SDA12: JP73.3 JP74.3 JP75.3 R38.1 U13.16
SDA13: JP79.3 JP80.3 JP81.3 R41.1 U14.16
SDA14: JP85.3 JP86.3 JP87.3 R44.1 U15.16
SDA15: JP91.3 JP92.3 JP93.3 R47.1 U16.16
XD: U1.14
XD1: U2.14
XD2: U3.14
XD3: U4.14
XD4: U5.14
XD5: U6.14
XD6: U7.14
XD7: U8.14
XD8: U9.14
XD9: U10.14
XD10: U11.14
XD11: U12.14
XD12: U13.14
XD13: U14.14
XD14: U15.14
XD15: U16.14